# Altium PCB Irrigation_ArduinoNode_v1.PcbDoc
Units mil, origin at the board's own origin, x right, y up, seen from the top; angles counter-clockwise.
Board outline 3945 x 3950 mil, 2 copper layers (Top Layer, Bottom Layer); 81 components, 61 nets, 261 pads, 64 vias.
Unrouted connection lines stored in the file: 4.
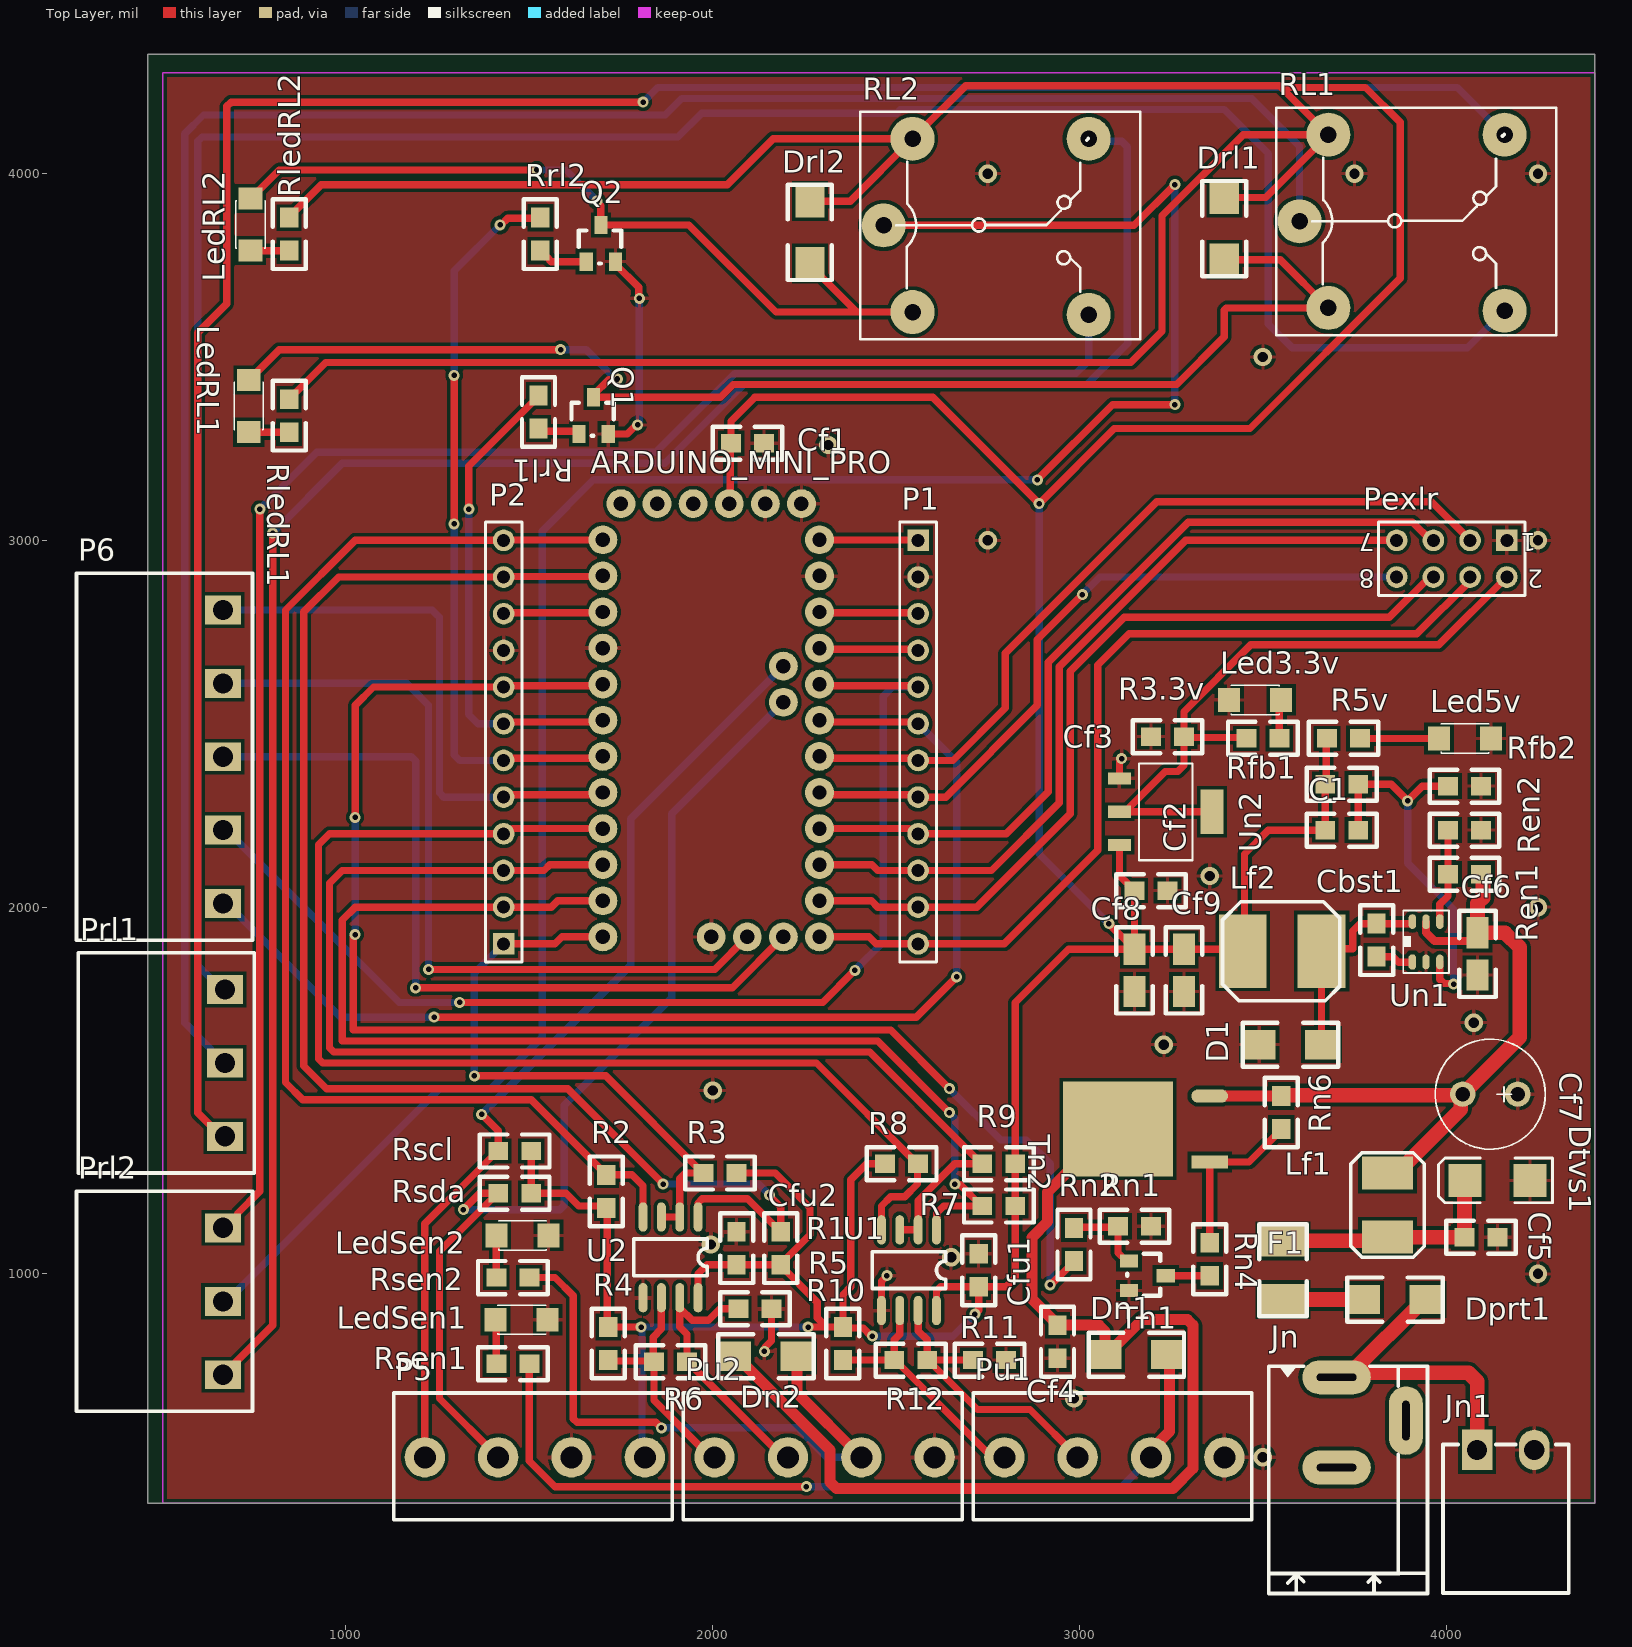
[diagram p0: Top Layer view]
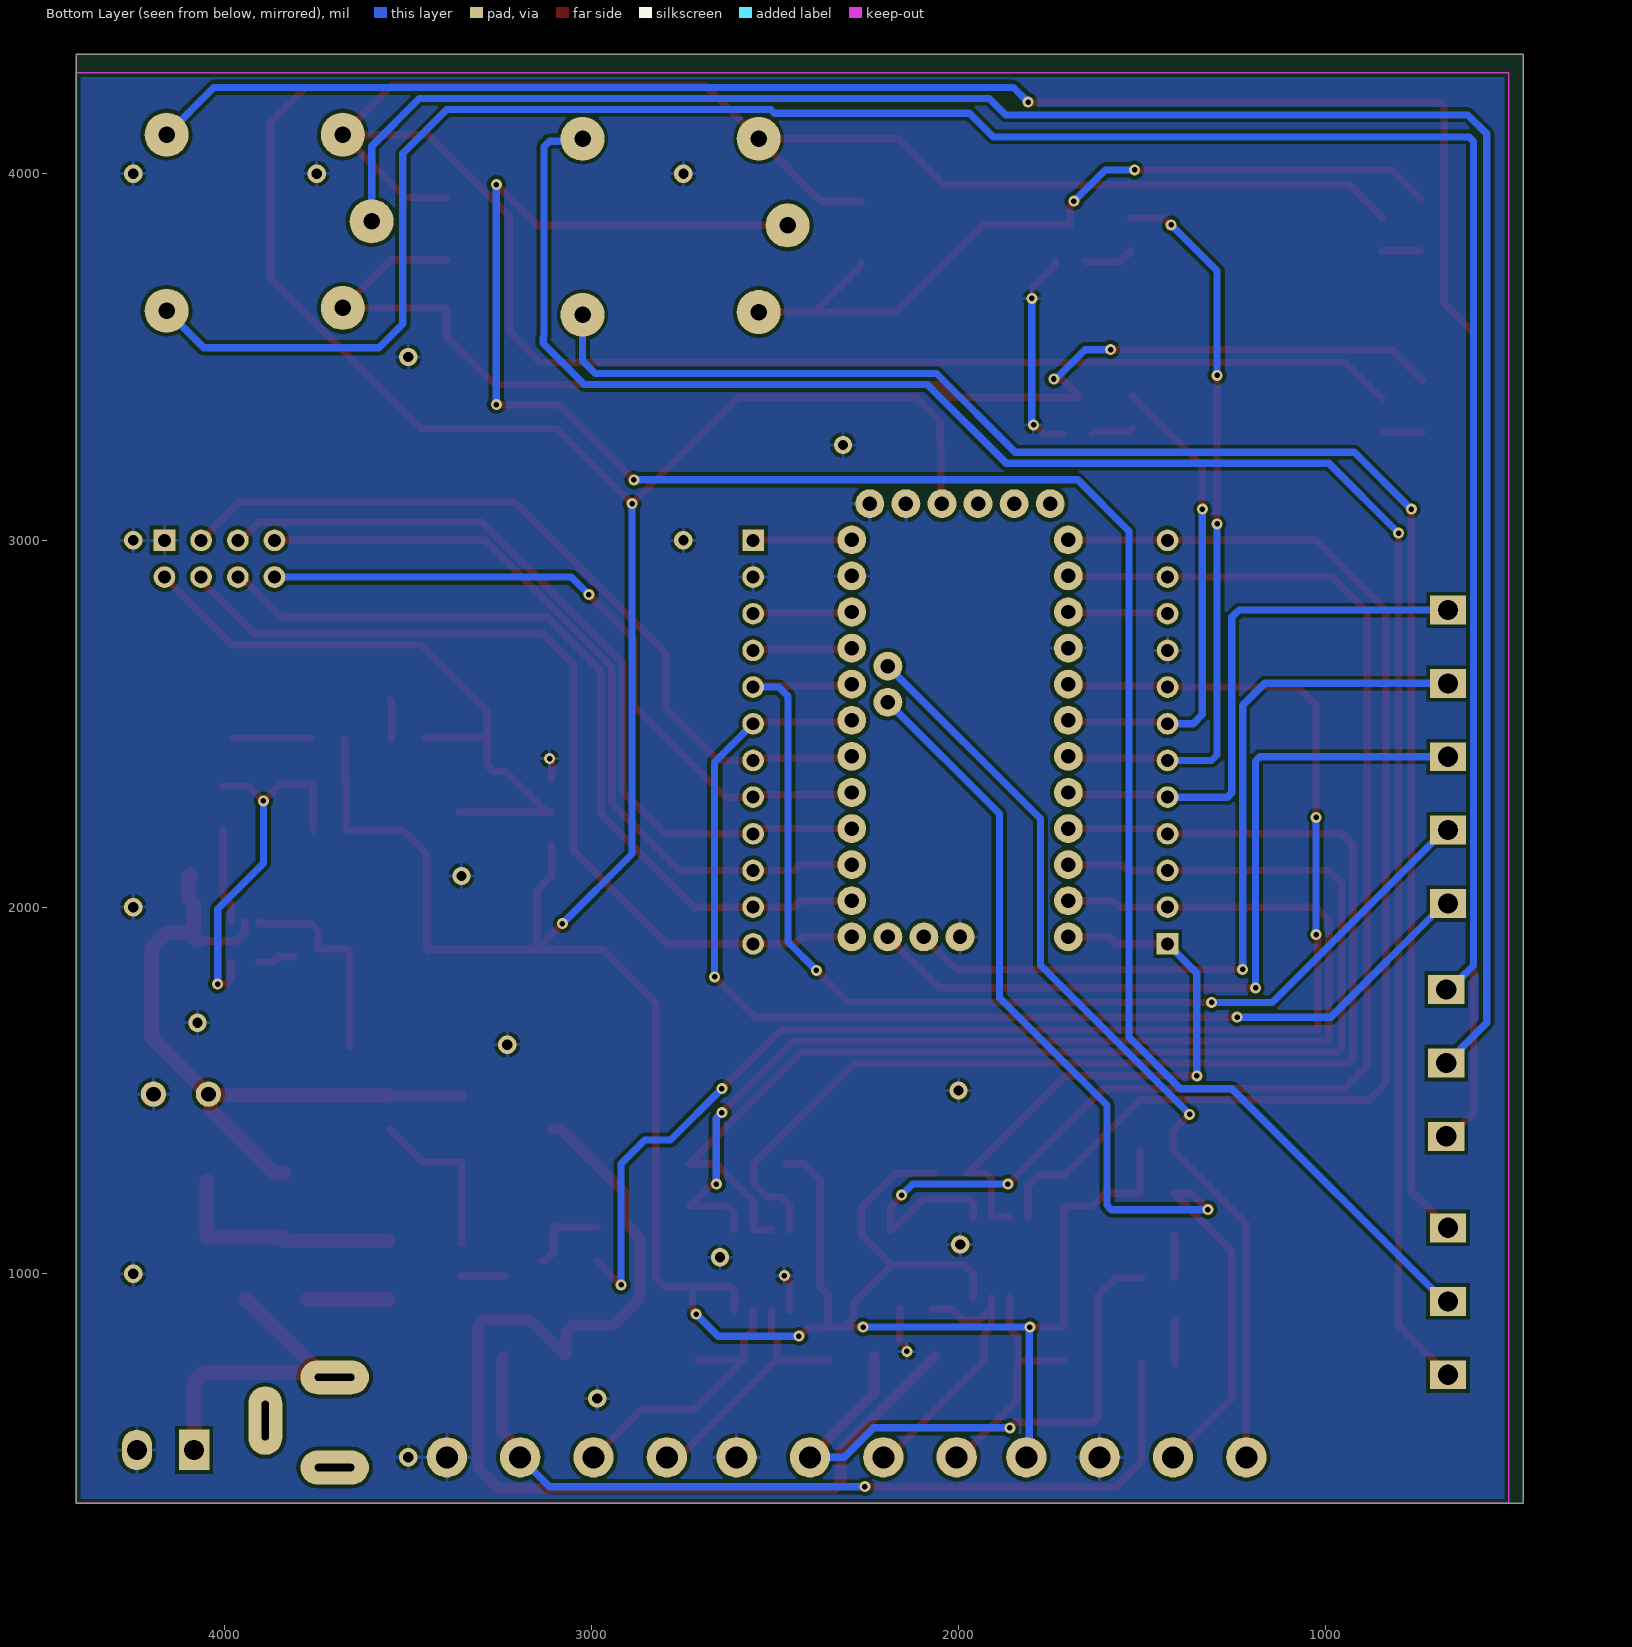
[diagram p1: Bottom Layer view, seen from below]

## Layer stack, top to bottom
Top Solder: solder mask 0.4, Solder Resist, Dk 3.5
Top Layer: signal copper 1.4
Dielectric 1: dielectric 12.6, FR-4, Dk 4.8
Bottom Layer: signal copper 1.4
Bottom Solder: solder mask 0.4, Solder Resist, Dk 3.5

## Board outline
460,375 460,4325 4405,4325 4405,375

## Design rules (kind name [scope] priority, off if disabled: settings)
Clearance Clearance_1 [All] p1: gap=10 ignorepadtopadclearanceinfootprint=FALSE
Clearance Clearance_GND [InNet('GND')] p2: gap=13 ignorepadtopadclearanceinfootprint=FALSE
HoleSize [All] p1: absolutevalues=TRUE maxlimit=200 minlimit=1 maxpercent=80.000 minpercent=20.000
MinimumSolderMaskSliver [All] p1: minsoldermaskwidth=8
PlaneConnect [All] p1: planeconnectstyle=Relief reliefexpansion=20 reliefentries=4 reliefconductorwidth=20 reliefairgap=10
PolygonConnect [All] p1: connectstyle=Relief reliefconductorwidth=10 reliefentries=4 polygonreliefangle="90 Angle" airgapwidth=10
RoutingVias [All] p1: holewidth=15 width=30 viastyle="Through Hole" minholewidth=10 minwidth=20 maxholewidth=48 maxwidth=150
SilkToSilkClearance [All] p1: silktosilkclearance=0
SilkToSolderMaskClearance [IsPad] p1: minsilkscreentomaskgap=0 clearancetoexposedcopper=TRUE
SolderMaskExpansion SolderMaskExpansion_1 [All] p1: expansion=4 istentingtop=FALSE
SolderMaskExpansion [IsVia] p2: expansion=4 istentingtop=FALSE
Width Width_pow12v [InNet('VCC12v')] p1: maxlimit=44 minlimit=10 preferedwidth=40 minimp=50.000000 maximp=50.000000 favimp=50.000000
Width [All] p2: maxlimit=50 minlimit=10 preferedwidth=20 minimp=50.000000 maximp=50.000000 favimp=50.000000
Width Width_powsen [InNet('Vsen1')] p3: maxlimit=44 minlimit=10 preferedwidth=40 minimp=50.000000 maximp=50.000000 favimp=50.000000
25 further rules are at their usual default settings.

## Components (designator, comment, footprint, x,y, rotation, side; value= is the part's Value field where it differs from the comment)
ARDUINO_MINI_PRO "" ARDUINO_MINI_PRO 1798.94,2942.52 r0 top
C1 "" 0805c 3670,2210 r0 top value=100pF
Cbst1 "" 0805c 3810,1865 r90 top value=100pF
Cf1 "104" 0805c 2140,3265 r180 top
Cf2 "104" 0805c 3240,2045 r180 top
Cf3 "104" 0805c 3195,2465 r0 top
Cf4 "104" 0805c 2940,770 r90 top
Cf5 "" 0805c 4050,1100 r0 top value=100pF
Cf6 "CAP" 1206e 4085,1930 r270 top
Cf7 "CAPACITOR" cc15r15 4045,1490 r0 top
Cf8 "CAP" 1206e 3150,1885 r270 top
Cf9 "CAP" 1206e 3285,1885 r270 top
Cfu1 "104" 0805c 2725,1055 r270 top
Cfu2 "104" 0805c 2065,1115 r270 top
D1 "Diode" Sma 3490,1625 r0 top
Dn1 "Diode" Sma 3070,780 r0 top
Dn2 "Diode" Sma 2060,775 r0 top
Dprt1 "DIODE" sma 3945,930 r180 top
Drl1 "Diode" Sma 3395,3765 r90 top
Drl2 "Diode" Sma 2265,3755 r90 top
Dtvs1 "DIODE" smb 4140,1255 r180 top
F1 "FUSE" 1812E 3555,930 r90 top
Jn "" CON3_129_PJ-002A_TH_RA 3701,718 r90 top
Jn1 "" "CON 2 HT3.96" 4084.09,520 r0 top
Led3.3v "" LED-1206-Red 3550,2565 r180 top
Led5v "" LED-1206-Red 3980,2460 r0 top
LedRL1 "" LED-1206-Red 735,3295 r90 top
LedRL2 "" LED-1206-Red 740,3790 r90 top
LedSen1 "" LED-1206-Red 1408,875 r0 top
LedSen2 "" LED-1206-Red 1410,1105 r0 top
Lf1 "INDUCTOR" IND_SPR05x 3840,1100 r90 top
Lf2 "" IND_SPR06xe 3660,1880 r180 top value=10mH
P1 "Header 12" HDR1X12 2560,3000 r270 top
P2 "Header 12" HDR1X12 1430,1900 r90 top
P5 "Header 4" giacdung4 1615,500 r180 top
P6 "CON 5 EDG5.08" "CON 5 5EDG5.08" 665,2010 r90 top
Pexlr "nRF24L01" HDR2X4 4165,3000 r180 top
Prl1 "CON 3 EDG5.08" "CON 3 3EDG5.08" 670,1375 r90 top
Prl2 "CON 3 EDG5.08" "CON 3 3EDG5.08" 665,725 r90 top
Pu1 "Header 4" giacdung4 3195,500 r180 top
Pu2 "Header 4" giacdung4 2405,500 r180 top
Q1 "" SOT23-3 1635,3290 r0 top value=C9014
Q2 "" SOT23-3 1655,3760 r0 top value=C9014
R1 "10k" 0805c 2185,1115 r270 top
R2 "10k" 0805c 1710,1270 r270 top
R3 "10k" 0805c 1975,1275 r0 top
R3.3v "10k" 0805c 3455,2460 r0 top
R4 "20k" 0805c 1715,765 r90 top
R5 "20k" 0805c 2160,905 r180 top
R5v "10k" 0805c 3675,2460 r0 top
R6 "120" 0805c 1930,760 r180 top
R7 "10k" 0805c 2735,1185 r0 top
R8 "10k" 0805c 2560,1300 r180 top
R9 "10k" 0805c 2735,1300 r0 top
R10 "20k" 0805c 2355,765 r90 top
R11 "20k" 0805c 2800,765 r180 top
R12 "120" 0805c 2585,765 r180 top
Ren1 "1k" 0805c 4095,2090 r180 top
Ren2 "1k" 0805c 4095,2210 r180 top
Rfb1 "1k" 0805c 3760,2335 r180 top
Rfb2 "1k" 0805c 4095,2330 r180 top
RL1 "Relay" "Relay 5 Chan SRD" 3600,3870 r0 top
RL2 "Relay" "Relay 5 Chan SRD" 2465.94,3858.78 r0 top
RledRL1 "1k" 0805c 845,3385 r270 top
RledRL2 "1k" 0805c 845,3880 r270 top
Rn1 "1k" 0805c 3195,1130 r180 top
Rn2 "10k" 0805c 2985,1035 r90 top
Rn4 "10k" 0805c 3355,995 r90 top
Rn6 "10k" 0805c 3550,1485 r270 top
Rrl1 "1k" 0805c 1525,3395 r270 top
Rrl2 "1k" 0805c 1530,3880 r270 top
Rscl "10k" 0805c 1505,1335 r180 top
Rsda "10k" 0805c 1505,1220 r180 top
Rsen1 "1k" 0805c 1500,755 r180 top
Rsen2 "1k" 0805c 1500,990 r180 top
Tn1 "c1815" sot23-3 3135,1035 r270 top
Tn2 "CON3" dpak 3355,1305 r90 top
U1 "MAX485" so-8 2610,1120 r270 top
U2 "MAX485" so-8 1960,1155 r270 top
Un1 "AOZ1282CI" Sot23-6 3940,1910 r90 top
Un2 "LM1117-3.3" SOT230 3235,2260 r0 top

## Footprints (in the part's own frame and the unit in brackets; to place one, negate y for a bottom-side part, rotate by r counter-clockwise, add the part's x,y. Pads: shape width x height; smd on the part's side, far side on the other; paste and mask are expansions set on the pad)
0805c [mil]
  rect 54x50 smd: 1(0,0) 2(90,0)
  silkscreen extent -50,-45 140,45
1206e [mil]
  rect 85x60 smd: 1(0,0) 2(115,0)
  silkscreen extent -60,-50 175,50
1812E [mil]
  rect 85x128 smd: 1(0,0) 2(160,0)
  silkscreen extent -45,-65 205,65
ARDUINO_MINI_PRO [mm]
  round 2 hole 1: 2(-2.5,-8.5) 3(-2.5,-11) 4(-2.5,-13.5) 5(-2.5,-16) 6(-2.5,-18.5) 7(-2.5,-21) 8(-2.5,-23.5) 9(-2.5,-26) 10(12.5,-26) 11(12.5,-23.5) 12(12.5,-21) 13(12.5,-18.5) A0(12.5,-16) A1(12.5,-13.5) A2(12.5,-11) A3(12.5,-8.5) A4(10,-9.75) A5(10,-7.25) A6(7.5,-26) A7(10,-26) DTR(-1.25,4) GND(-2.5,-6) GND(5,-26) GND(8.75,4) GND(11.25,4) GND(12.5,-1) RAW(12.5,1.5) RST(-2.5,-3.5) RST(12.5,-3.5) RX(-2.5,-1) RX(3.75,4) TX(-2.5,1.5) TX(1.25,4) VCC(6.25,4) VCC(12.5,-6)
cc15r15 [mil]
  round 69 hole 40: 1(0,0) 2(150,0)
  silkscreen extent -75,-150 225,150
CON3_129_PJ-002A_TH_RA [mm] "DC JACK"
  oval 2.35x4.75 hole 0.5 slot 2.75 at 90 deg: 1(0,0) 2(-6.248,0)
  oval 4.75x2.35 hole 2.75 slot 0.5 at 90 deg: 3(-2.997,-4.801)
  silkscreen extent -14.98,-6.3 0.81,4.7, body extent -13.92,-4.93 0.48,4.47, height 11.01
"CON 2 HT3.96" [mm]
  rect 2.1x2.794 hole 1.4: 1(0,0)
  oval 2.1x2.794 hole 1.4: 2(3.96,0)
  silkscreen extent -2.36,-9.91 6.35,0.38, body extent -1.97,-10 6.03,0, height 7.02
"CON 3 3EDG5.08" [mm]
  rect 2x2.5 hole 1.4: 1(0,0) 2(5.08,0) 3(10.173,0)
  silkscreen extent -2.54,-2.03 12.71,10.16, body extent -2.5,-1.75 12.67,10.25, height 3.15
"CON 5 5EDG5.08" [mm]
  rect 2x2.5 hole 1.4: 1(0,0) 2(5.08,0) 3(10.16,0) 4(15.24,0) 5(20.32,0)
  silkscreen extent -2.54,-2.03 22.86,10.16, body extent -2.5,-1.75 22.82,10.25, height 3.15
dpak [mil]
  rect 36x100 smd: 1(0,0)
  rect 260x300 smd: 2(90,250)
  oval 36x100 smd: 3(180,0)
giacdung4 [mil]
  round 110 hole 60: 1(-200,0) 2(0,0) 3(200,0) 4(400,0)
  silkscreen extent -275,-175 485,170
HDR1X12 [mm] "Connector; Header; 12 Position"
  rect 1.5x1.5 hole 0.9: 1(0,0)
  round 1.5 hole 0.9: 2(2.54,0) 3(5.08,0) 4(7.62,0) 5(10.16,0) 6(12.7,0) 7(15.24,0) 8(17.78,0) 9(20.32,0) 10(22.86,0) 11(25.4,0) 12(27.94,0)
  silkscreen extent -1.27,-1.27 29.21,1.27
HDR2X4 [mm] "Connector; Header; 4x2 Position"
  rect 1.5x1.5 hole 0.9: 1(0,0)
  round 1.5 hole 0.9: 2(0,2.54) 3(2.54,0) 4(2.54,2.54) 5(5.08,0) 6(5.08,2.54) 7(7.62,0) 8(7.62,2.54)
  silkscreen extent -1.27,-1.27 8.89,3.81
IND_SPR05x [mil]
  rect 90x140 smd: 1(0,0) 2(175,0)
  silkscreen extent -55,-100 230,100
IND_SPR06xe [mil]
  rect 130x200 smd: 1(0,0) 2(215,0)
  silkscreen extent -50,-135 270,135
LED-1206-Red [mil]
  rect 60x65 smd: 1(0,0) 2(142,0)
  silkscreen extent 6,-40 136,40, body extent 7,-31 133,32, height 43
"Relay 5 Chan SRD" [mil] "Relay SPDT, 5 pin, 10A,W 650mil, L 800mil, H 800mil"
  round 120 hole 45: 1(0,0) 2(559.06,236.22) 3(559.06,-243.78) 4(78.74,-236.22) 5(78.74,236.22)
  silkscreen extent -63,-311 700,310, body extent -55,-306 697,304, height 602
Sma [mil]
  rect 90x80 smd: 1(0,0) 2(170,0)
  silkscreen extent -45,-60 215,60
sma [mil]
  rect 90x80 smd: 1(0,0) 2(170,0)
  silkscreen extent -45,-60 215,60
smb [mm] "DO-214-AA/SMB; 2 C-Bend Leads; Body 5.3 x 3.6 mm, inc. leads (LxW)"
  rect 2.3x2.3 smd: 1(-2.25,0) 2(2.25,0)
  silkscreen extent -3.8,-1.55 4.1,1.55
so-8 [mil]
  oval 80x24 smd: 1(0,0) 2(0,-50) 3(0,-100) 4(0,-150) 5(220,-150) 6(220,-100) 7(220,-50) 8(220,0)
  silkscreen extent 60,-175 160,25
SOT23-3 [mil]
  rect 36x50 smd: 1(0,0) 2(80,0) 3(40,100)
  silkscreen extent -20,-5 95,85
sot23-3 [mil]
  rect 36x50 smd: 1(0,0) 2(80,0) 3(40,100)
  silkscreen extent -20,-5 95,85
Sot23-6 [mil]
  oct 40x20 smd: 1(-59.41,32.4)
  oval 40x20 smd: 2(-59.41,-4.6) 3(-59.41,-42.6) 4(50.59,-42.6) 5(50,-5) 6(50.59,32.4)
  silkscreen extent -89,-68 81,57, body extent -64,-64 54,54, height 51
SOT230 [mil]
  rect 63x33 smd: 1(-126,91) 2(-126,0) 3(-126,-91)
  rect 63x122 smd: 4(126,0)
  silkscreen extent -73,-132 73,132

## Part data
ARDUINO_MINI_PRO: library part ARDUINO_MINI_PRO
C1 Cbst1 Cf1 Cf2 Cf3 Cf4 Cf5 Cfu1 Cfu2: library part Cap, "Capacitor", LatestRevisionDate=17-Jul-2002, LatestRevisionNote="Re-released for DXP Platform.", PackageReference=RAD-0.3, Published=8-Jun-2000, Publisher="Altium Limited"
Cf6 Cf7 Cf8 Cf9: "Capacitor"
D1 Dn1 Dn2 Drl1 Drl2: "Default Diode", Code_JEDEC=DO-214-AB, LatestRevisionDate=17-Jul-2002, LatestRevisionNote="Re-released for DXP Platform.", PackageReference=SMC, PackageVersion=Sep-1996, Published=8-Jun-2000, Publisher="Altium Limited"
Dprt1 Dtvs1: "Diode"
F1: library part FUSE1, "Fuse"
Jn: library part CON-PLG_3X1-228-DC_JACK, "3 Pins, 1 Row 228mil Pitch, right angle Connector, male", Alternate Part Number-1=NA, Case/Package=TH-CON, Manufacturer=JST, Manufacturer Part Number=PJ-002A, Supplier Part Number-1=NA, Supplier-1="SP ROAD"
Jn1: library part "CON 2 HT3.96", "Cắm", Chung_Loai=Cắm, Don_Vi=Con, Ma_Hang=MH000984, Ten_Linh_Kien="CON 2 HT3.96-2P 3.96MM (Cam Cong)"
Led3.3v Led5v LedRL1 LedRL2 LedSen1 LedSen2: library part "LED 1206 Do", "Dán", Chung_Loai=Dán, Don_Vi=Con, Ma_Hang=MH002334, Ten_Linh_Kien="LED1206 Màu Đỏ (Red)"
Lf2: library part Inductor, "Inductor", Code_IEC=1005, Code_JEITA=0402, LatestRevisionDate=29-May-2009, LatestRevisionNote="IPC-7351 Footprint Added.", PackageDescription="Chip Inductor", PackageReference=0402-A, Published=8-Jun-2000, Publisher="Altium Limited"
P1 P2: "Header, 12-Pin", LatestRevisionDate=17-Jul-2002, LatestRevisionNote="Re-released for DXP Platform.", Publisher="Altium Limited"
P5 Pu1 Pu2: "Header, 4-Pin", LatestRevisionDate=17-Jul-2002, LatestRevisionNote="Re-released for DXP Platform.", Publisher="Altium Limited"
P6 Prl1 Prl2: "Cắm", Chung_Loai=Cắm, Don_Vi=Con
  P6: Ma_Hang=MH003589, Ten_Linh_Kien="CON 5 2EDG5.08-5P 5.08MM ( Xanh Cong)"
  Prl1 Prl2: Ma_Hang=MH000760, Ten_Linh_Kien="CON 3 2EDG5.08-3P 5.08MM ( Xanh Cong)"
Pexlr: library part "Header 4X2", "Header, 4-Pin, Dual row", LatestRevisionDate=17-Jul-2002, LatestRevisionNote="Re-released for DXP Platform.", Publisher="Altium Limited"
Q1 Q2: library part "Trans C1815 HF SMD", "SOT-23"
R1 R2 R3 R3.3v R4 R5 R5v R6 R7 R8 R9 R10 R11 R12 Ren1 Ren2 Rfb1 Rfb2 RledRL1 RledRL2 Rn1 Rn2 Rn4 Rn6 Rrl1 Rrl2 Rscl Rsda Rsen1 Rsen2: library part RES2
RL1 RL2: library part "Relay 5 Chan SRD", "Relay 5 Chan", Ma_Hang=MH009374, Ten="Relay 5V10A SRD-05VDC-SL-C Chính Hãng"
Tn1: library part CON3, "Connector"
Tn2: "Connector"
U1 U2: library part DS36F95, "DIFFERENTIAL BUS TRANSCEIVERS"
Un1: "AOZ1282"
Un2: "Regulador de tensÃ£o linear IC 1 Output 800mA SOT-223-4", Package="SOT-223-4 Texas Instruments", Availability=Unavailable, MF="Texas Instruments", MP=LM1117-3.3, Price=None, SnapEDA_Link=https://www.snapeda.com/parts/LM1117-3.3/Texas%20Instruments/view-part/549181/?ref=snap

## Via types
v1: diameter 30, hole 15, Top Layer to Bottom Layer, 47 vias
v2: diameter 50, hole 28, Top Layer to Bottom Layer, 17 vias

## Nets (pads, with @x,y where several pads share a name; then routed paths per layer and width w, separated by ;. In a path a pad name is that pad's centre, name@x,y a point inside that pad or via, vN(x,y) a via of type N, cw(c..) or ccw(c..) an arc to the next point about the centre after c; other vN are vias at no path point)
A2: ARDUINO_MINI_PRO.A2 P1.6 P6.1 | length 3180.3
  Top Layer w20: v1(1240,1700) 2555,1700 v1(2665,1810) ; ARDUINO_MINI_PRO.A2 2295.79,2504.72 2555.28,2504.72 P1.6
  Bottom Layer w20: P6.1 674.84,2010 984.84,1700 v1(1240,1700) ; P1.6 2665,2395 v1(2665,1810)
A3: ARDUINO_MINI_PRO.A3 P1.5 P6.2 | length 3110.5
  Top Layer w20: v1(1310,1740) 2299.93,1740 v1(2387.59,1827.66) ; ARDUINO_MINI_PRO.A3 2295,2603.94 2556.06,2603.94 P1.5
  Bottom Layer w20: P6.2 674.84,2210 1144.84,1740 v1(1310,1740) ; v1(2387.59,1827.66) 2465,1905.07 2465,2575 2490,2600 P1.5
A6: ARDUINO_MINI_PRO.A6 P6.4 | length 2210.9
  Top Layer w20: v1(1225,1830) 2005.32,1830 ARDUINO_MINI_PRO.A6
  Bottom Layer w20: P6.4 1165,2610 1225,2550 v1(1225,1830)
A7: ARDUINO_MINI_PRO.A7 P6.3 | length 2208.3
  Top Layer w20: v1(1190,1780) 2053.74,1780 ARDUINO_MINI_PRO.A7
  Bottom Layer w20: P6.3 1178.28,2410 1190,2398.28 v1(1190,1780)
COM1: Prl1.2 RL1.1 | length 5923.5
  Bottom Layer w20: Prl1.2 660.16,1575 630.79,1604.37 630.79,1614.21 560,1685 560,4108.28 611.72,4160 1870.86,4160 1915.86,4205 3470,4205 3600,4075 RL1.1
COM2: Prl2.2 RL2.1 | length 5856.3
  Top Layer w20: RL2.1 3148.78,3858.78 v1(3260,3970) ; v1(2885,3165) 3090,3370 v1(3260,3370)
  Bottom Layer w20: Prl2.2 674.84,925 1254.84,1505 1395,1505 1535,1645 1535,3025 1675,3165 v1(2885,3165) ; v1(3260,3370) v1(3260,3970)
D3: ARDUINO_MINI_PRO.3 P2.7 Rrl1.1 | length 1328.5
  Top Layer w20: v1(1335,3085) 1335,3203 1525,3393 Rrl1.1 ; P2.7 1434.72,2504.72 1695.79,2504.72 ARDUINO_MINI_PRO.3
  Bottom Layer w20: v1(1335,3085) 1335,2525 1360,2500 P2.7
D4: ARDUINO_MINI_PRO.4 P2.6 Rrl2.1 | length 2032.5
  Top Layer w20: v1(1295,3045) v1(1295,3450) ; v1(1420,3860) 1422.71,3860 1440.71,3878 1530,3878 Rrl2.1 ; P2.6 1435.51,2405.51 1695,2405.51 ARDUINO_MINI_PRO.4
  Bottom Layer w20: v1(1295,3045) 1295,2415 1310,2400 P2.6 ; v1(1295,3450) 1295,3735 v1(1420,3860)
D5: ARDUINO_MINI_PRO.5 P2.5 P6.5 | length 1532.2
  Top Layer w20: P2.5 1436.3,2306.3 1694.21,2306.3 ARDUINO_MINI_PRO.5
  Bottom Layer w20: P6.5 1235,2810 1244.97,2800.03 1255,2790 1255,2311.72 1266.72,2300 P2.5
GND: ARDUINO_MINI_PRO.GND Cf1.1 Cf2.1 Cf3.1 Cf4.1 Cf5.2 Cf6.2 Cf7.2 Cf8.2 Cf9.2 Cfu1.1 Cfu2.1 D1.1 Dtvs1.1 Jn1.2 Led3.3v.2 Led5v.2 LedSen1.2 LedSen2.2 P1.2 P2.9 P5.2 Pexlr.1 Pu1.1 Pu2.1 Q1.2 Q2.2 R5.1 R11.1 Ren2.1 Rfb2.1 Rn1.1 Tn1.2 U1.5 U2.5 Un1.2 Un2.1 | length 846.2
  Top Layer w20: Q1.2 1767.29,3290 1792.29,3315 v1(1795,3315) ; Q2.2 1735,3753 1798.09,3689.91 1798.09,3661.91 v1(1800,3660) ; v1(2140.84,788.81) 2142.75,790.72 2142.75,800.46 2160,817.71 R5.1 ; U1.5 2460,980 v1(2475,995) ; Un2.1 3109,2396.29 3115,2402.29 v1(3115,2405)
  Bottom Layer w20: v1(1795,3315) 1800,3320 v1(1800,3660)
  other v2: 3500,500 2985,660 4250,1000 2650,1045 1995,1080 2000,1500 3230,1625 4075,1685 4250,2000 3355,2085 2750,3000 4250,3000 2315,3260 3500,3500 2750,4000 3750,4000 4250,4000
LoraDIO0: ARDUINO_MINI_PRO.A0 P1.8 Pexlr.8 | length 1932.8
  Top Layer w20: ARDUINO_MINI_PRO.A0 2297.36,2306.3 2553.7,2306.3 P1.8 2635,2300 2885,2550 2885,2729.5 v1(3007.75,2852.25)
  Bottom Layer w20: v1(3007.75,2852.25) 3055.5,2900 Pexlr.8
LoraMISO: ARDUINO_MINI_PRO.12 P1.10 Pexlr.7 | length 2170.1
  Top Layer w20: ARDUINO_MINI_PRO.12 2434.25,2115.75 2450,2100 P1.10 2760,2100 2945,2285 2945,2655.15 3289.85,3000 Pexlr.7
LoraMOSI: ARDUINO_MINI_PRO.11 P1.11 Pexlr.6 | length 2281
  Top Layer w20: ARDUINO_MINI_PRO.11 2432.68,2017.32 2450,2000 P1.11 2720,2000 2975,2255 2975,2642.72 3122.28,2790 3845,2790 3955,2900 Pexlr.6
LoraNSS: ARDUINO_MINI_PRO.10 P1.12 Pexlr.4 | length 2497.7
  Top Layer w20: ARDUINO_MINI_PRO.10 2426.1,1918.9 2445,1900 P1.12 2795,1900 3050,2155 3050,2660 3135,2745 3920,2745 4065,2890 Pexlr.4
LoraRST: ARDUINO_MINI_PRO.A1 P1.7 Pexlr.3 | length 2201.3
  Top Layer w20: ARDUINO_MINI_PRO.A1 2296.57,2405.51 2554.49,2405.51 P1.7 2655,2400 2797.86,2542.86 2797.86,2691.86 3211.01,3105 3960,3105 Pexlr.3
LoraSCK: ARDUINO_MINI_PRO.13 P1.9 Pexlr.5 | length 2258.7
  Top Layer w20: ARDUINO_MINI_PRO.13 2535.26,2214.17 2549.43,2200 P1.9 2800,2200 2915,2315 2915,2667.57 3296.95,3049.53 3908.05,3049.53 3957.57,3000 Pexlr.5
Max485RW1: ARDUINO_MINI_PRO.7 P2.3 R9.1 U1.2 U1.3 | length 3470.4
  Top Layer w20: ARDUINO_MINI_PRO.7 1555.75,2115.75 1540,2100 P2.3 990,2100 955,2065 955,1616.72 966.72,1605 2428,1605 R9.1@2733,1300 ; U1.3 U1.2 2560,1200 2660,1300 R9.1@2733,1300 ; R9.1 R9.1@2733,1300
Max485RW2: ARDUINO_MINI_PRO.9 P2.1 R3.1 U2.2 U2.3 | length 1630.5
  Top Layer w20: v1(1350,1540) 1708,1540 R3.1@1973,1275 ; P2.1 1570,1900 1588.9,1918.9 ARDUINO_MINI_PRO.9 ; U2.3 U2.2 1910,1260 1925,1275 R3.1@1973,1275 ; R3.1 R3.1@1973,1275
  Bottom Layer w20: v1(1350,1540) 1350,1820 P2.1
NC1: Prl1.1 RL1.2 | length 6436.4
  Top Layer w20: Prl1.1 660.16,1375 595.79,1439.37 595.79,3566.29 675,3645.5 675,4183.28 686.72,4195 v1(1810,4195)
  Bottom Layer w20: v1(1810,4195) 1850,4235 4030.28,4235 RL1.2
NC2: Prl2.1 RL2.2 | length 5547.9
  Top Layer w20: Prl2.1 800,860 v1(800,3020)
  Bottom Layer w20: v1(800,3020) 990,3210 1870,3210 2085,3425 3020,3425 3131.72,3536.72 3131.72,3553.28 3130,3555 3130,4073.28 3115,4088.28 3031.72,4088.28 RL2.2
NetC1_2: C1.2 Rfb1.1 Rfb2.2 Un1.3 | length 1047
  Top Layer w20: C1.2 Rfb1.1 3850,2335 v1(3895,2290) 3935,2330 Rfb2.2 ; Un1.3 3982.6,1803.63 3994.31,1791.91 4018.09,1791.91 v1(4020,1790)
  Bottom Layer w20: v1(3895,2290) 3895,2120 4020,1995 v1(4020,1790)
NetCbst1_1: Cbst1.1 Un1.1 | length 104.4
  Top Layer w20: Cbst1.1 3855,1865 3870,1850 3907.6,1850 Un1.1
NetCbst1_2: Cbst1.2 D1.2 Lf2.1 Un1.6 | length 572.5
  Top Layer w20: D1.2@3660,1620 Lf2.1 3666.72,1886.72 3745,1886.72 3745,1935 3765,1955 Cbst1.2 3907.6,1955 Un1.6
NetCf5_1: Cf5.1 Dtvs1.2 F1.2 Lf1.1 | length 654.1
  Top Layer w20: Dtvs1.2@4050,1253.58 Dtvs1.2
  Top Layer w40: F1.2 3840,1090 Lf1.1@3842.46,1092.46 ; Lf1.1 Cf5.1 Dtvs1.2@4050,1253.58
NetDprt1_2: Dprt1.2 F1.1 | length 220
  Top Layer w40: F1.1 Dprt1.2
NetLed3.3v_1: Led3.3v.1 R3.3v.2 | length 107.1
  Top Layer w20: R3.3v.2 3545,2560 Led3.3v.1
NetLed5v_1: Led5v.1 R5v.2 | length 215
  Top Layer w20: R5v.2 Led5v.1
NetLedRL1_1: LedRL1.1 RledRL1.2 | length 110
  Top Layer w20: LedRL1.1 RledRL1.2
NetLedRL2_1: LedRL2.1 RledRL2.2 | length 105
  Top Layer w20: LedRL2.1 RledRL2.2
NetLedSen1_1: LedSen1.1 Rsen1.2 | length 120.8
  Top Layer w20: LedSen1.1 1410,873 Rsen1.2
NetLedSen2_1: LedSen2.1 Rsen2.2 | length 115
  Top Layer w20: Rsen2.2 LedSen2.1
NetQ1_1: Q1.1 Rrl1.2 | length 116.2
  Top Layer w20: Rrl1.2 1532.5,3297.5 1627.5,3297.5 Q1.1
NetQ2_1: Q2.1 Rrl2.2 | length 138.6
  Top Layer w20: Rrl2.2 1530,3788 1545,3773 1547,3773 1560,3760 Q2.1
NetRen1_2: Ren1.2 Ren2.2 Un1.4 | length 258.7
  Top Layer w20: Un1.4 3982.6,2007.6 4005,2030 Ren1.2 Ren2.2
NetRn1_2: Rn1.2 Rn2.2 Tn1.1 | length 233.6
  Top Layer w20: Rn2.2 2987.5,1127.5 3102.5,1127.5 Rn1.2 3105,1058 3128,1035 Tn1.1
NetRn4_1: Rn4.1 Tn1.3 | length 120
  Top Layer w20: Tn1.3 Rn4.1
NetRn4_2: Rn4.2 Rn6.2 Tn2.1 | length 453.5
  Top Layer w20: Rn4.2 Tn2.1 3462,1305 3550,1393 Rn6.2
NO1: Prl1.3 RL1.3 | length 6532
  Bottom Layer w20: Prl1.3 660.16,1775.5 630.79,1804.87 630.79,1805.83 595.79,1840.83 595.79,4088.28 607.5,4100 1905,4100 1970,4165 2501.55,4165 2511.55,4175 3395,4175 3515,4055 3515,3590 3580,3525 4057.83,3525 RL1.3
NO2: Prl2.3 RL2.3 | length 4559.4
  Top Layer w20: Prl2.3 674.84,1125.5 704.21,1154.87 704.21,1164.71 765,1225.5 v1(765,3085)
  Bottom Layer w20: v1(765,3085) 920,3240 1845,3240 2060,3455 2990,3455 3025,3490 RL2.3
PowRS485: ARDUINO_MINI_PRO.2 P2.8 Rn2.1 | length 4060.8
  Top Layer w20: v1(1025,1925) 1020,1920 1020,1665 2485,1665 v1(2645,1505) ; v1(1025,2245) 1025,2550 1075,2600 P2.8 1433.94,2603.94 1696.57,2603.94 ARDUINO_MINI_PRO.2 ; v1(2920,970) 2922,970 2985,1033 Rn2.1
  Bottom Layer w20: v1(1025,1925) v1(1025,2245) ; v1(2645,1505) 2785,1365 2855,1365 2920,1300 v1(2920,970)
Qc1: Drl1.1 LedRL1.2 Q1.3 RL1.4 | length 3648
  Top Layer w20: LedRL1.2 818,3520 v1(1585,3520) ; v1(1740,3440) 1738.09,3438.09 1716.09,3438.09 1675,3397 Q1.3 2021.25,3390 2056.25,3425 3265,3425 3395,3555 3395,3628.19 3400.59,3633.78 RL1.4 3547.52,3765 Drl1.1
  Bottom Layer w20: v1(1585,3520) 1655,3520 1735,3440 v1(1740,3440)
Qc2: Drl2.1 LedRL2.2 Q2.3 RL2.4 | length 2214.9
  Top Layer w20: LedRL2.2 818,4010 v1(1520,4010) ; v1(1685,3925) 1685,3922.29 1695,3912.29 Q2.3 1935,3860 2172.44,3622.56 2392.44,3622.56 ; Drl2.1 2265,3750 2392.44,3622.56 ; RL2.4 2392.44,3622.56
  Bottom Layer w20: v1(1520,4010) 1600,4010 v1(1685,3925)
RS485A1: Pu1.4 R10.1 R12.2 U1.6 | length 691
  Top Layer w20: R10.1 R12.2 ; U1.6 2510,835 2495,820 R12.2 ; Pu1.4 2777.78,517.22 2744.78,517.22 2497,765 R12.2
RS485A2: Pu2.4 R4.1 R6.2 U2.6 | length 639.6
  Top Layer w20: R4.1 1717.5,762.5 1837.5,762.5 1837.5,827.5 1860,850 U2.6 ; R6.2 1840,655 1995,500 Pu2.4
RS485B1: Pu1.3 R11.2 R12.1 U1.7 | length 788.1
  Top Layer w20: U1.7 2560.77,899.23 2560.77,844.23 2585,820 R12.1 R12.1@2587,765 ; R11.2 R12.1@2587,765 ; Pu1.3 2865,630 2722,630 R12.1@2587,765
RS485B2: Pu2.3 R5.2 R6.1 U2.7 | length 753.1
  Top Layer w20: U2.7 U2.7@1910,907 ; R5.2 2020,905 1988.28,873.28 1943.72,873.28 U2.7@1910,907 ; Pu2.3 2192,500 1932,760 R6.1 1930,835 1910,855 U2.7@1910,907
RSTPin: ARDUINO_MINI_PRO.RST P1.3 P2.10 | length 543.4
  Top Layer w20: P2.10 1432.36,2802.36 1698.15,2802.36 ARDUINO_MINI_PRO.RST@1700.51,2804.72 ; ARDUINO_MINI_PRO.RST@2291.06,2804.72 2293.43,2802.36 2557.64,2802.36 P1.3
RX1: ARDUINO_MINI_PRO.8 P2.2 R7.1 U1.1 | length 3273.3
  Top Layer w20: ARDUINO_MINI_PRO.8 1577.32,2017.32 1560,2000 P2.2 1025,2000 990,1965 990,1635 2450,1635 v1(2645,1440) ; U1.1 2610.77,1120.77 2610.77,1165.77 2630,1185 2733,1185 2674.91,1243.09 2661.91,1243.09 v1(2660,1245)
  Bottom Layer w20: v1(2645,1440) 2660,1425 v1(2660,1245)
RX2: ARDUINO_MINI_PRO.RX P2.11 R1.1 U2.1 | length 3925.2
  Top Layer w20: ARDUINO_MINI_PRO.RX@1700.51,2903.15 1698.94,2901.57 1431.57,2901.57 P2.11 980,2900 885,2805 885,1566.72 946.72,1505 1605,1505 v1(1865,1245) ; U2.1 1960,1193.28 1971.72,1205 2095,1205 2168,1132 2170,1132 2185,1117 2185,1182.29 2155,1212.29 v1(2155,1215)
  Bottom Layer w20: v1(1865,1245) 2125,1245 v1(2155,1215)
SCL: ARDUINO_MINI_PRO.A5 P5.4 Rscl.2 | length 2600.5
  Top Layer w20: P5.4 1215,1137 1413,1335 Rscl.2 1415,1390 v1(1370,1435)
  Bottom Layer w20: v1(1370,1435) 1776.3,1841.3 1776.3,2240.75 ARDUINO_MINI_PRO.A5
SDA: ARDUINO_MINI_PRO.A4 P5.3 Rsda.2 | length 2864.7
  Top Layer w20: v1(1320,1175) 1365,1220 Rsda.2@1413,1220 ; P5.3 1255,660 1255,1062 Rsda.2@1413,1220 ; Rsda.2 Rsda.2@1413,1220
  Bottom Layer w20: v1(1320,1175) 1583.28,1175 1595,1186.72 1595,1460 1888.2,1753.2 1888.2,2254.22 ARDUINO_MINI_PRO.A4
TX1: ARDUINO_MINI_PRO.6 P2.4 R8.1 U1.4 | length 3374.7
  Top Layer w20: ARDUINO_MINI_PRO.6 1454.74,2214.17 1440.57,2200 P2.4 955,2200 925,2170 925,1586.72 936.72,1575 2283,1575 2558,1300 R8.1 2558.28,1298.28 2558.28,1245 2523.28,1210 2485,1210 2460,1185 U1.4
TX2: ARDUINO_MINI_PRO.TX P2.12 R2.1 U2.4 | length 3411
  Top Layer w20: ARDUINO_MINI_PRO.TX@1700.51,3001.57 1699.72,3000.79 1430.79,3000.79 P2.12 1025,3000 835,2810 835,1521.72 881.72,1475 1505,1475 1693,1287 1695,1287 1710,1272 R2.1 1780,1270 1810,1240 U2.4
V+: Dprt1.1 Jn1.1 Jn.1 | length 863.2
  Top Layer w40: Jn.1@3705,730 Jn.1@3740,730 ; Dprt1.1 3940,930 Jn.1@3740,730 ; Jn1.1 4084.09,706.57 4060.66,730 Jn.1@3740,730
VCC3.3v: Cf3.2 Pexlr.2 R3.3v.1 Un2.2 Un2.4 | length 1815.7
  Top Layer w20: Un2.2 Un2.2@3124,2260 ; Un2.4 Un2.2@3124,2260 ; R3.3v.1 3452.5,2462.5 3287.5,2462.5 Cf3.2 ; Pexlr.2 3980,2715 3467.22,2715 3285,2532.78 Cf3.2 ; Un2.2@3124,2260 3234,2370 3268.28,2370 3285,2386.72 Cf3.2
VCC5v: ARDUINO_MINI_PRO.VCC C1.1 Cf1.2 Cf2.2 Cf8.1 Cf9.1 Cfu1.2 Cfu2.2 Drl1.2 Drl2.2 Lf2.2 P1.4 P5.1 R1.2 R2.2 R3.2 R4.2 R5v.1 R7.2 R8.2 R9.2 R10.2 Rfb1.2 RL1.5 RL2.5 RledRL1.1 RledRL2.1 Rscl.1 Rsda.1 U1.8 U2.8 Un2.3 | length 18299.8
  Top Layer w20: RledRL1.1 845,3387 860,3402 862,3402 945,3485 3140,3485 3225,3570 3225,3885 3446.22,4106.22 RL1.5 ; RledRL2.1 845,3882 933,3970 2040,3970 2165,4095 RL2.5 ; Rscl.1 Rsda.1 1600,1220 1635,1185 1705,1185 R2.2 1712.5,1177.5 1712.5,857.5 R4.2 v1(1805,855) ; U2.8 1960,1000 1985,1025 Cfu2.2 R1.2 ; ARDUINO_MINI_PRO.VCC@2042.36,3076.34 ARDUINO_MINI_PRO.VCC@2046.18,3080.16 ; ARDUINO_MINI_PRO.VCC@2045,3100 2047.5,3102.5 2047.5,3262.5 Cf1.2 2050,3325 2115,3390 2600,3390 v1(2890,3100) 3095,3305 3465,3305 3875,3715 3875,4140 3780,4235 3549.96,4235 ; R3.2 2170,1275 2265,1180 2265,1107 2185,1027 R1.2 ; v1(2260,855) 2310,855 ; Drl2.2 2374.68,3925 RL2.5 ; ARDUINO_MINI_PRO.VCC@2291.06,2706.3 2294.21,2703.15 2556.85,2703.15 P1.4 ; v1(2435,830) 2432.29,830 2410,852.29 2357.71,852.29 R10.2 ; R8.2 2420,1300 2376.72,1256.72 2376.72,965 2355,943.28 R10.2 ; U1.8 2610,953.28 2621.72,965 Cfu1.2 ; v1(2715,890) 2725,900 Cfu1.2 ; R9.2@2823,1300 R9.2 ; v1(3080,1955) Cf8.1 ; Un2.3 3109,2086 3133,2062 3133,2060 3148,2045 Cf2.2 Cf8.1 ; Drl1.2 3507.52,3935 RL1.5 ; R5v.1 3672.5,2457.5 3672.5,2337.5 Rfb1.2 C1.1 3515,2210 3450,2145 3450,1885 Lf2.2 3440,1885 Cf9.1 Cf8.1 ; R1.2 2185,1023 2285,923 2285,880 2310,855 ; 2310,855 R10.2 ; RL2.5 2689.68,4240 2785,4240 3544.96,4240 3549.96,4235 ; Cfu1.2 2800,965 2825,990 R7.2 R9.2 ; R9.2 2825,1740 2970,1885 Cf8.1 ; 3549.96,4235 RL1.5
  Bottom Layer w20: P5.1 1806.91,508.09 1806.91,853.09 v1(1805,855) v1(2260,855) ; v1(2435,830) 2655,830 v1(2715,890) ; v1(2890,3100) 2890,2145 v1(3080,1955)
VCC12v: Cf6.1 Cf7.1 Lf1.2 Ren1.1 Rn6.1 Tn2.3 Un1.5 | length 1961.9
  Top Layer w22: Un1.5 3945,1931.03 3968.08,1907.95 Cf6.1@4075,1907.95
  Top Layer w30: Tn2.3 Rn6.1
  Top Layer w40: Rn6.1 3552.5,1487.5 Cf7.1@4042.5,1487.5 ; Lf1.2 3865,1275 4039.45,1449.45 4039.45,1484.45 Cf7.1@4042.5,1487.5 ; Cf6.1@4075,1907.95 4085,1917.95 Cf6.1 ; Ren1.1 4100,2085 4100,2025 4085,2010 Cf6.1 ; Cf7.1@4042.5,1487.5 Cf7.1 4200,1645 4200,1890 4160,1930 Cf6.1
VCCRaw: ARDUINO_MINI_PRO.RAW P1.1 | length 269.6
  Top Layer w20: ARDUINO_MINI_PRO.RAW 2291.85,3000.79 2559.21,3000.79 P1.1
Vled1: Dn1.2 Pu1.2 Rsen1.1 | length 2332
  Top Layer w20: Rsen1.1 1500,490 1570,420 v1(2255,420) ; Pu1.2 Pu1.2@3195,520 ; Dn1.2 3235,780 Dn1.2@3245,770
  Top Layer w30: Pu1.2@3195,520 3245,570 Dn1.2@3245,770
  Bottom Layer w20: v1(2255,420) 3115,420 Pu1.2
Vled2: Dn2.2 Pu2.2 Rsen2.1 | length 1656.7
  Top Layer w20: Rsen2.1 1570,990 1620,940 1620,605 1630,595 1845,595 v1(1860,580) ; Dn2.2@2225,775 Dn2.2
  Top Layer w30: Dn2.2 2230,675 Pu2.2
  Bottom Layer w20: v1(1860,580) 2231.07,580 2311.07,500 Pu2.2
Vsen1: Cf4.2 Dn1.1 Dn2.1 Tn2.2 | length 3021.9
  Top Layer w20: Dn2.1 Dn2.1@2065,775 ; Cf4.2 Cf4.2@2940,862 ; Dn1.1 Dn1.1@3075,780
  Top Layer w30: Dn2.1@2065,775 2320,520 2320,432.57 2337.57,415 3255,415 3310,470 3310,860 3295,875 3170,875 Dn1.1@3075,780 ; Cf4.2 3053.28,860 3070,843.28 Dn1.1 ; Cf4.2@2940,862 2870,932 2870,1099.5 2912.73,1142.22 2912.73,1222.73 3085,1395 Tn2.2
pads on no net: ARDUINO_MINI_PRO.DTR Jn.2 Jn.3

## Polygon pours and split planes (outlines as drawn)
GND on Top Layer "GND_L01_P000" (solid, pour order 0): 500,4275 500,380 4405,380 4405,4275
GND on Bottom Layer "GND_L02_P001" (solid, pour order 1): 500,4275 500,380 505,375 4405,375 4405,4275

## Keep-outs
Keep-Out Layer:
  lines w3.94: 500,375 500,4275 4405,4275 4405,375 500,375

## Text inside footprints (layer, text, board x,y; h text height)
Pexlr: Top Overlay "8" at 3805,2920 h50 r180; Top Overlay "7" at 3805,3020 h50 r180; Top Overlay "1" at 4245,3020 h50 r180; Top Overlay "2" at 4265,2920 h50 r180